# Altium PCB YoctoBob_pcb_r1.0.0.PcbDoc
Units mm, origin at the board's own origin, x right, y up, seen from the top; angles counter-clockwise.
Board outline 24.5 x 18.5 mm, 4 copper layers (Top Layer, GND_POSITIVE_PLANE, MID_LAYER, Bottom Layer), stack 0.971 mm thick; 16 components, 17 nets, 56 pads, 15 vias.
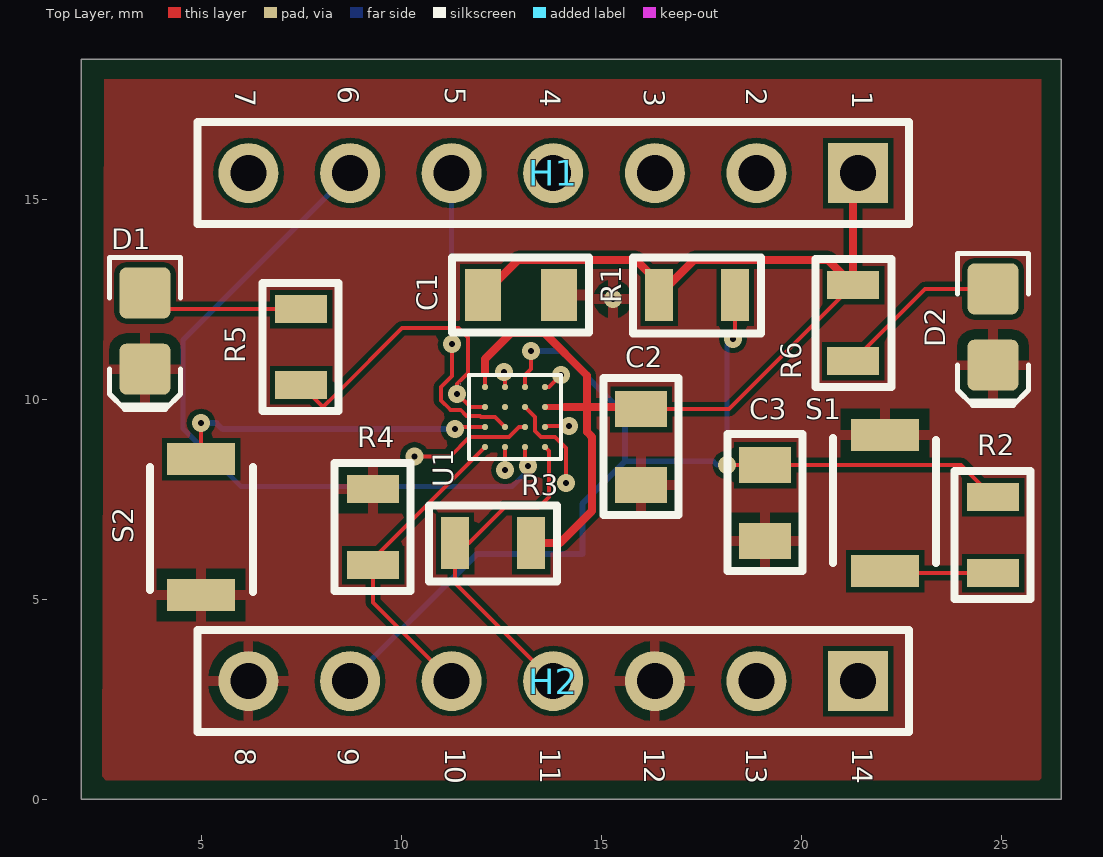
[diagram p0: Top Layer view]
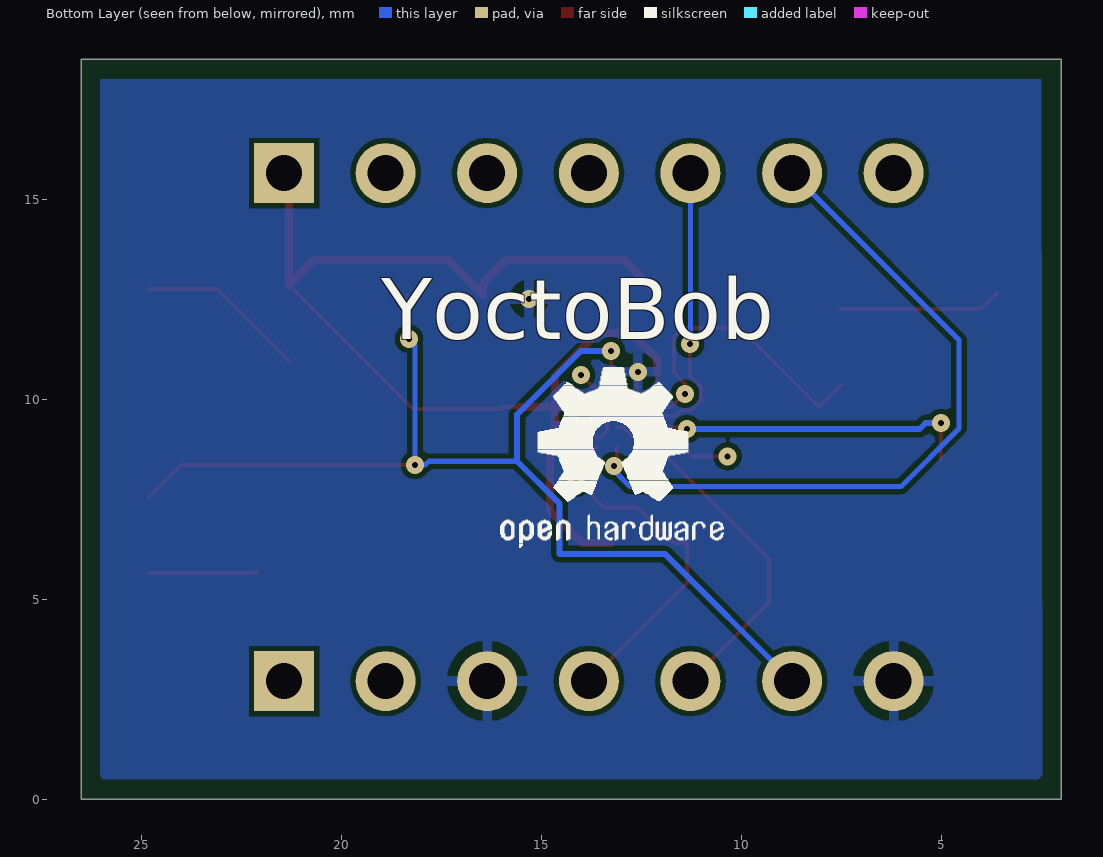
[diagram p1: Bottom Layer view, seen from below]
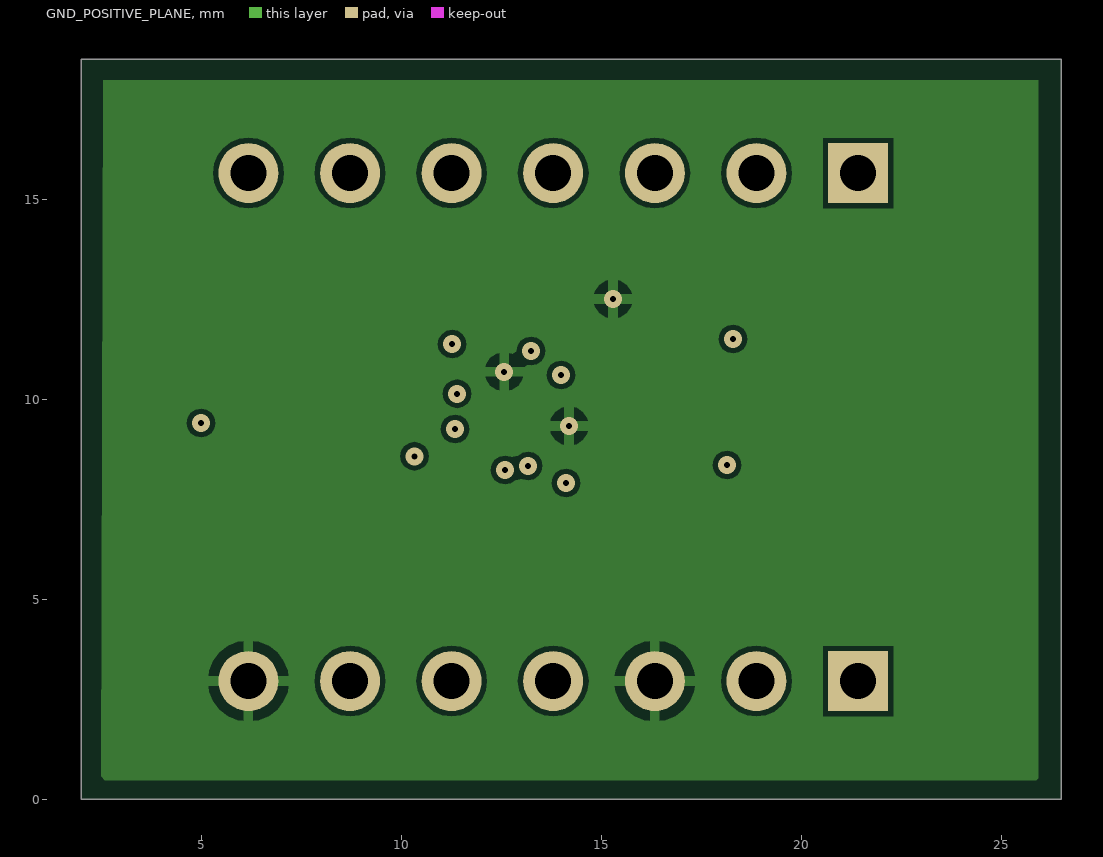
[diagram p2: GND_POSITIVE_PLANE]
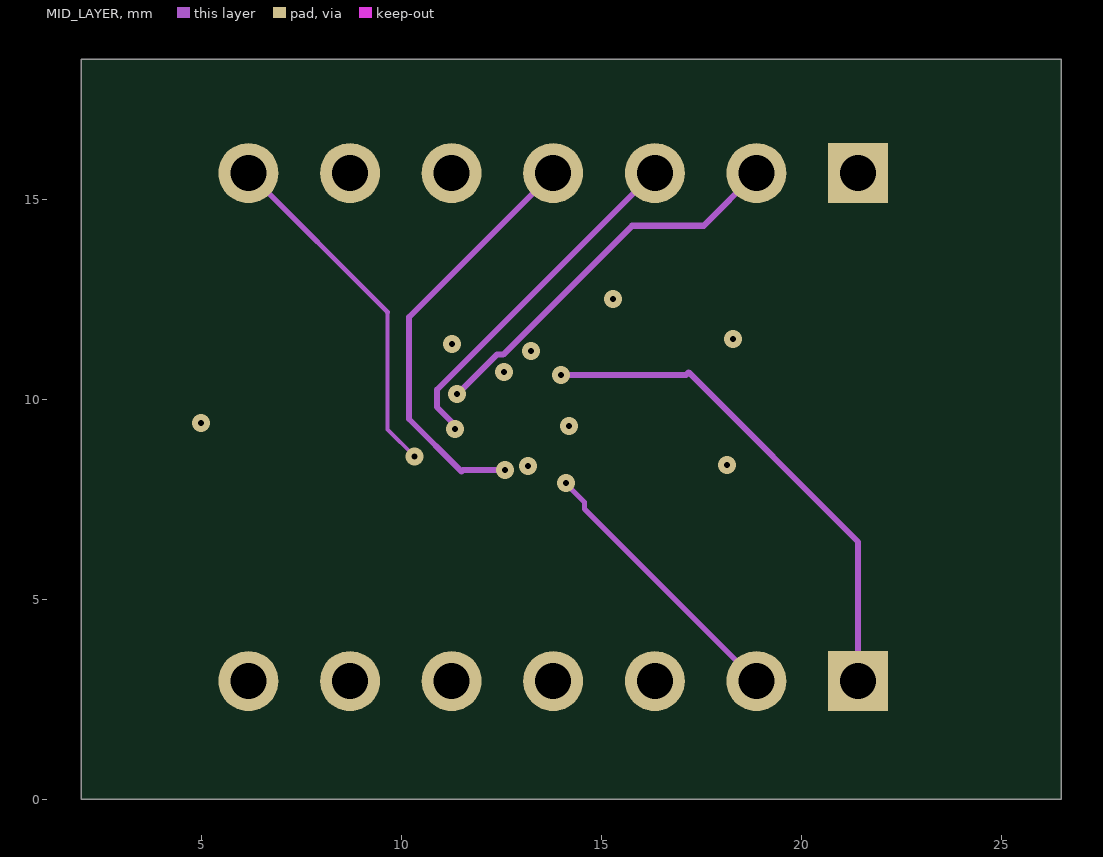
[diagram p3: MID_LAYER]

## Layer stack, top to bottom
Top Solder: solder mask 0.0102, Solder Resist, Dk 3.5
Top Layer: signal copper 0.0356
Dielectric 1: dielectric 0.32, FR-4, Dk 4.8
GND_POSITIVE_PLANE: signal copper 0.036
Dielectric 2: dielectric 0.254, Dk 4.2
MID_LAYER: signal copper 0.036
Dielectric 3: dielectric 0.254, Dk 4.2
Bottom Layer: signal copper 0.0356
Bottom Solder: solder mask 0.0102, Solder Resist, Dk 3.5

## Board outline
2,0 26.5,0 26.5,18.5 2,18.5

## Design rules (kind name [scope] priority, off if disabled: settings)
Clearance [All] p1: gap=0.125
HoleSize [All] p1: absolutevalues=TRUE maxlimit=2.54 minlimit=0.1 maxpercent=80.000 minpercent=20.000
HoleToHoleClearance [All] p1: gap=0.305 allowstackedmicrovias=TRUE
MinimumAnnularRing [All] p1: minimumring=0.102
PolygonConnect [All] p1: connectstyle=Relief reliefconductorwidth=0.254 reliefentries=4 polygonreliefangle="90 Angle" airgapwidth=0.254
RoutingVias [All] p1: holewidth=0.1 width=0.4 viastyle="Through Hole" minholewidth=0.1 minwidth=0.4 maxholewidth=0.711 maxwidth=1.27
SilkToSilkClearance [All] p1: silktosilkclearance=0.01
SolderMaskExpansion [All] p1: expansion=0.102
Width [All] p1: maxlimit=0.254 minlimit=0.1 preferedwidth=0.1
27 further rules are at their usual default settings.

## Components (designator, comment, footprint, x,y, rotation, side; value= is the part's Value field where it differs from the comment)
C1 "100nF" C0805 13,12.6 r180 top
C2 "100nF" C0805 16,8.8 r90 top
C3 "100nF" C0805 19.1,7.4 r90 top
D1 "RED LED" RED_LED_0805 3.6,11.7 r270 top
D2 "RED LED" RED_LED_0805 24.8,11.8 r270 top
H1 "7pin_header" HDR1X7 21.425,15.65 r180 top
H2 "7pin_header" HDR1X7 21.425,2.95 r180 top
R1 "100K" R0805 17.4,12.6 r180 top
R2 "470R" R0805 24.8,6.6 r90 top
R3 "100K" R0805 12.3,6.4 r180 top
R4 "100K" R0805 9.3,6.8 r90 top
R5 "470R" R0805 7.5,11.3 r90 top
R6 "470R" R0805 21.3,11.9 r270 top
S1 "switch" SWITCH_B3U-1000P 22.1,7.4 r90 top
S2 "switch" SWITCH_B3U-1000P 5,6.8 r270 top
U1 "LPC1102" BGA16x4 13.6,10.3 r270 top locked

## Footprints (in the part's own frame and the unit in brackets; to place one, negate y for a bottom-side part, rotate by r counter-clockwise, add the part's x,y. Pads: shape width x height; smd on the part's side, far side on the other; paste and mask are expansions set on the pad)
BGA16x4 [mm]
  round 0.15 smd: A1(0,-1.5) A2(0.5,-1.5) A3(1,-1.5) A4(1.5,-1.5) B1(0,-1) B2(0.5,-1) B3(1,-1) B4(1.5,-1) C1(0,-0.5) C2(0.5,-0.5) C3(1,-0.5) C4(1.5,-0.5) D1(0,0) D2(0.5,0) D3(1,0) D4(1.5,0)
  silkscreen extent -0.3,-1.9 1.8,0.4
C0805 [mm]
  rect 0.9x1.3 smd: 1(-0.95,0) 2(0.95,0)
  silkscreen extent -1.7,-0.94 1.73,0.94
HDR1X7 [mm] "Connector; Header; 7 Position"
  rect 1.5x1.5 hole 0.9: 1(0,0)
  round 1.5 hole 0.9: 2(2.54,0) 3(5.08,0) 4(7.62,0) 5(10.16,0) 6(12.7,0) 7(15.24,0)
  silkscreen extent -1.27,-1.27 16.51,1.27
R0805 [mm]
  rect 0.7x1.3 smd: 1(-0.95,0) 2(0.95,0)
  silkscreen extent -1.6,-0.94 1.6,0.97
RED_LED_0805 [mil]
  rrect25% 50x50 smd: 1(-37.5,0) 2(37.5,0)
  silkscreen extent -72,-35 77,35
SWITCH_B3U-1000P [mm]
  rect 0.8x1.7 smd: 1(-1.7,0) 2(1.7,0)
  silkscreen extent -1.5,-1.28 1.63,1.3

## Via types
v1: diameter 0.45, hole 0.15, Top Layer to Bottom Layer, tented both sides, 14 vias
v2: diameter 0.45, hole 0.152, Top Layer to Bottom Layer, tented both sides, 1 vias

## Nets (pads, with @x,y where several pads share a name; then routed paths per layer and width w, separated by ;. In a path a pad name is that pad's centre, name@x,y a point inside that pad or via, vN(x,y) a via of type N, cw(c..) or ccw(c..) an arc to the next point about the centre after c; other vN are vias at no path point)
GND: C1.1 C2.1 C3.1 D1.2 D2.2 H2.3 H2.7 R4.2 S1.2 S2.2 U1.B1 U1.D3 | length 1.1
  Top Layer w0.1: U1.B1 v1@12.6,10.739 ; U1.D3 13.625,9.325 v1(14.201,9.325)
  other v1: 12.58,10.681 15.3,12.5
NetD1_1: D1.1 R5.2 | length 4.1
  Top Layer w0.1: D1.1 4.002,12.25 R5.2
NetD2_1: D2.1 R6.2 | length 4.2
  Top Layer w0.1: R6.2 23.103,12.752 D2.1
NetR2_1: R2.1 S1.1 | length 2.7
  Top Layer w0.1: S1.1 22.15,5.65 R2.1
PIO0_8: H1.2 R5.1 U1.A2 | length 17.9
  Top Layer w0.1: R5.1 8.05,9.8 8.382,10.132 10.021,11.771 11.443,11.771 11.677,11.537 11.677,10.656 11.401,10.379 v1(11.401,10.132) 11.732,9.8 U1.A2
  MID_LAYER w0.152: v1(11.401,10.132) 11.401,10.114 12.396,11.11 12.554,11.11 15.777,14.333 17.568,14.333 H1.2 ; H1.2@18.585,15.95 H1.2@18.885,16.25
PIO0_9: H1.3 S2.1 U1.A3 | length 17.6
  Top Layer w0.1: S2.1 v1(5,9.4) ; v1(11.351,9.25) 11.4,9.3 U1.A3
  MID_LAYER w0.152: v1(11.351,9.25) 11.351,9.255 11.395,9.3 10.9,9.795 10.9,10.237 16.313,15.65 H1.3 H1.3@16.345,16.25
  Bottom Layer w0.152: v1(5,9.4) 5.384,9.4 5.534,9.25 v1(11.351,9.25)
PIO0_10/SWCLK: H2.5 R4.1 U1.A4 | length 8.2
  Top Layer w0.1: H2.5@10.99,2.675 H2.5@11.265,2.4 ; H2.5 9.3,4.915 R4.1 9.3,6 U1.A4
PIO0_11/AD0: H1.4 U1.B4 | length 11.2
  Top Layer w0.1: v1@12.6,8.189 U1.B4
  MID_LAYER w0.152: v1(12.601,8.225) 11.547,8.225 11.511,8.189 10.2,9.5 10.2,12.045 H1.4
PIO1_0/AD1: H1.5 U1.B3 | length 8.1
  Top Layer w0.1: v1(11.277,11.371) 11.277,10.574 11.001,10.297 11.001,9.966 11.235,9.732 11.482,9.732 11.639,9.575 11.971,9.575 11.996,9.55 12.204,9.55 12.35,9.55 U1.B3
  Bottom Layer w0.127: v1@11.265,11.371 H1.5 ; H1.5@11.265,16.25 H1.5@11.565,15.95
PIO1_1/AD2: H1.6 U1.C4 | length 18.2
  Top Layer w0.1: U1.C4 13.1,8.3 13.129,8.329 v1(13.178,8.329)
  Bottom Layer w0.127: H1.6 4.55,11.475 4.55,9.262 6.002,7.81 12.773,7.81 13.178,8.215 v1(13.178,8.329)
PIO1_2/AD3: H1.7 U1.C3 | length 11.9
  Top Layer w0.1: v1(10.337,8.569) 11.235,8.569 11.716,9.05 11.996,9.05 12.204,9.05 12.496,9.05 12.704,9.05 12.954,9.3 U1.C3
  MID_LAYER w0.1: 9.666,12.169 9.666,9.24 v1(10.337,8.569)
  MID_LAYER w0.127: H1.7 9.666,12.169
PIO1_3/SDWIO: H2.4 R3.2 U1.D4 | length 9
  Top Layer w0.1: U1.D4 13.703,8.697 13.703,7.553 13.438,7.288 12.588,7.288 11.7,6.4 R3.2 11.35,5.405 H2.4 ; H2.4@13.639,2.784 H2.4@13.943,2.48
PIO1_6/RXD: H2.2 U1.C2 | length 10
  Top Layer w0.1: U1.C2 13.35,9.55 13.35,9.404 ; 13.35,9.404 13.35,9.196 13.496,9.05 13.704,9.05 13.85,9.05 14.125,8.775 v2(14.125,7.9)
  MID_LAYER w0.127: v2@14.137,7.868 14.586,7.419 14.586,7.249 H2.2
  MID_LAYER w0.152: H2.2@18.885,2.4 H2.2
PIO1_7/TXD: H2.1 U1.D1 | length 13.2
  Top Layer w0.1: U1.D1 13.7,10.3 v1(14,10.6)
  MID_LAYER w0.152: v1(14,10.6) 17.123,10.6 17.188,10.665 21.425,6.428 H2.1
RESET_N: C3.2 H2.6 R1.1 R2.2 U1.C1 | length 29.5
  Top Layer w0.1: U1.C1 13.1,10.6 13.251,10.751 v1(13.251,11.201) ; v1(18.15,8.35) C3.2 24,8.35 R2.2 ; v1(18.3,11.5) 18.35,11.55 R1.1
  Bottom Layer w0.127: 15.6,8.444 17.806,8.444 17.9,8.35 v1(18.15,8.35) 18.15,11.35 v1(18.3,11.5)
  Bottom Layer w0.152: H2.6@8.725,2.4 H2.6@9,2.675 ; H2.6 11.896,6.121 14.535,6.121 14.535,7.379 15.6,8.444 15.6,9.606 14.005,11.201 v1(13.251,11.201) v1@13.251,11.051
VDD: C1.2 C2.2 H1.1 R1.2 R3.1 R6.1 U1.A1 U1.D2 | length 32.1
  Top Layer w0.1: C1.2 C1.2@12.05,12.75 ; U1.A1 12.1,10.65 ; C2.2@15.55,9.8 C2.2@15.95,9.8 ; C2.2 18.2,9.75 R6.1 ; H1.1@21.3,16.125 H1.1@21.425,16.25
  Top Layer w0.15: U1.D2 14.1,9.8
  Top Layer w0.2: C1.2 12.925,13.475 15.875,13.475 16.45,12.9 R1.2 17.325,13.475 20.675,13.475 R6.1 21.3,15.525 H1.1 ; 12.1,10.65 12.1,11 12.751,11.651 13.586,11.651 14.654,10.582 14.654,9.8 ; R3.1 13.975,6.4 14.776,7.201 14.776,9.054 14.654,9.175 14.654,9.8 ; 14.1,9.8 14.654,9.8 ; C2.2@15.55,9.8 14.654,9.8
XTALIN: U1.B2

## Polygon pours and split planes (outlines as drawn)
GND on Bottom Layer "L6-No Net 1" (solid, pour order 4): 2.5,18 26.025,18 26.025,0.5 26,0.475 25.975,0.5 2.475,0.5
GND on Top Layer "L6-No Net 1" (solid, pour order 10): 2.575,18 26,18 26,0.525 25.95,0.475 2.525,0.475
GND on GND_POSITIVE_PLANE "L6-No Net 1" (solid, pour order 12): 2.55,17.975 25.925,17.975 25.925,0.525 25.875,0.475 2.5,0.475

## Silkscreen, mask and mechanical layers (free items; w line width, h text height)
Top Overlay:
  text "6" at 8.425,17.825 h0.51 r270
  text "5" at 11.1,17.8 h0.51 r270
  text "2" at 18.625,17.775 h0.51 r270
  text "7" at 5.85,17.75 h0.51 r270
  text "4" at 13.475,17.75 h0.51 r270
  text "3" at 16.075,17.75 h0.51 r270
  text "1" at 21.275,17.7 h0.51 r270
  text "." at 11.467,10.357 h0.13
  text "8" at 5.85,1.275 h0.51 r270
  text "9" at 8.425,1.275 h0.51 r270
  text "10" at 11.1,1.275 h0.51 r270
  text "11" at 13.475,1.275 h0.51 r270
  text "12" at 16.075,1.275 h0.51 r270
  text "13" at 18.625,1.275 h0.51 r270
  text "14" at 21.275,1.275 h0.51 r270
Bottom Overlay:
  drawing of 668 lines, arcs and shapes, not listed
  text "YoctoBob" at 19,11.5 h1.52
Mechanical 15:
  the board outline again, w0.102